# Altium PCB End OptoSwitch type2M.PcbDoc
Units mm, origin at the board's own origin, x right, y up, seen from the top; angles counter-clockwise.
Board outline 152.4 x 101.6 mm, 2 copper layers (Top Layer, Bottom Layer); 4 components, 5 nets, 16 pads, 5 vias.
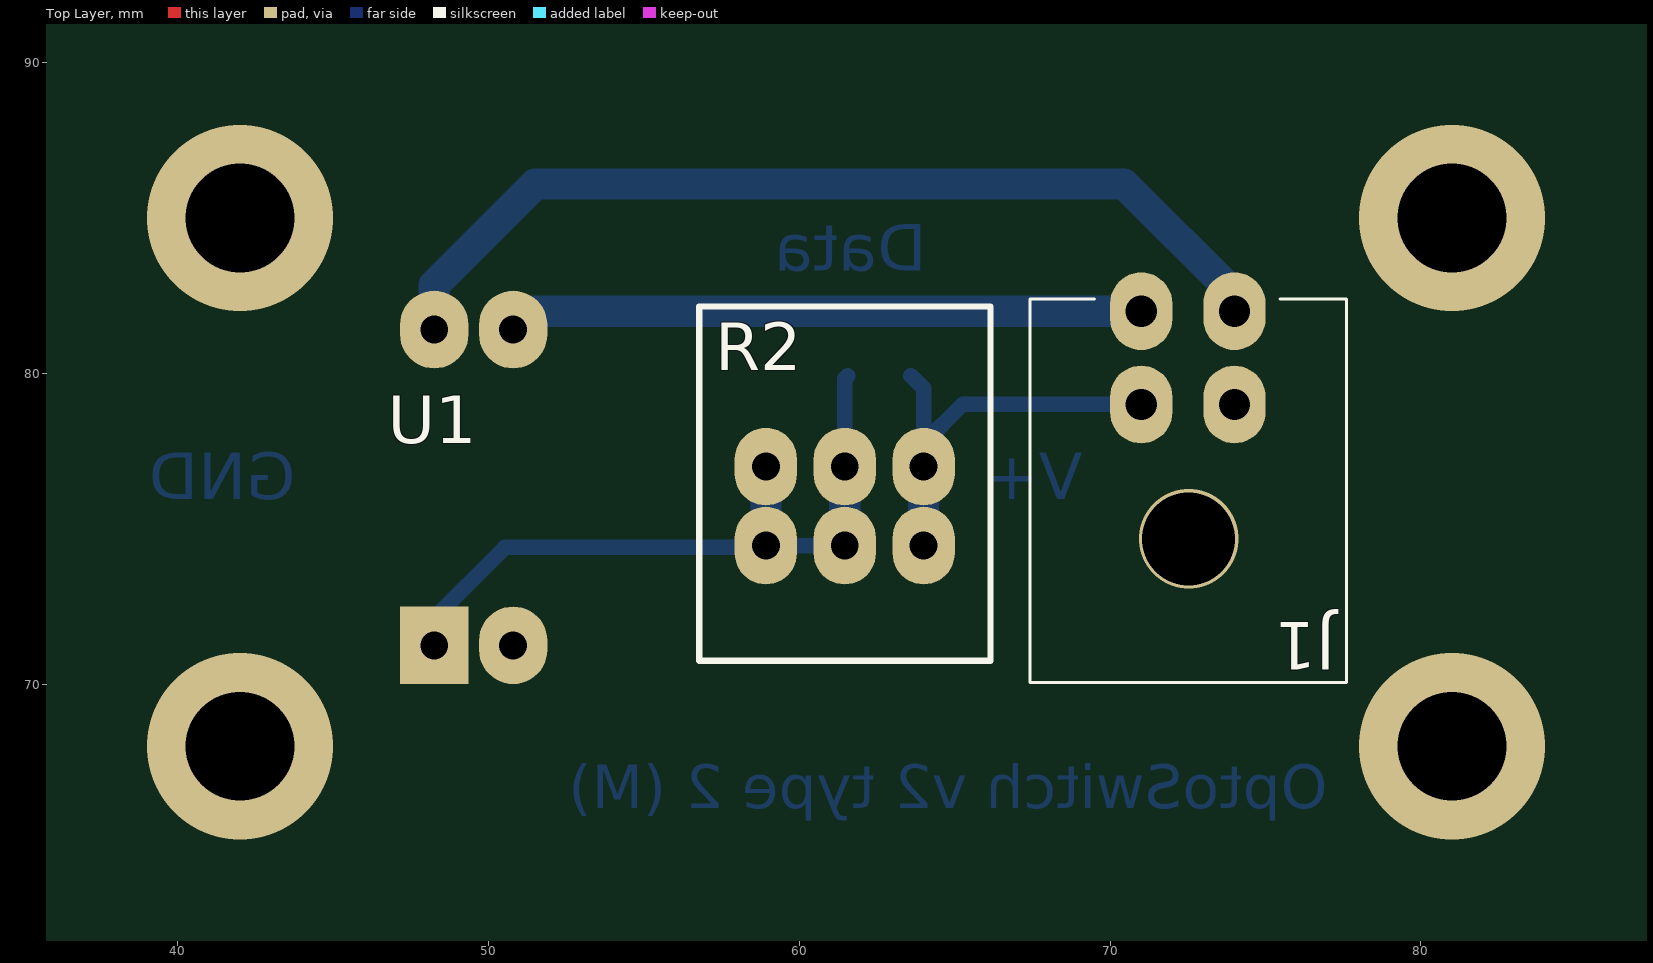
[diagram p0: Top Layer view]
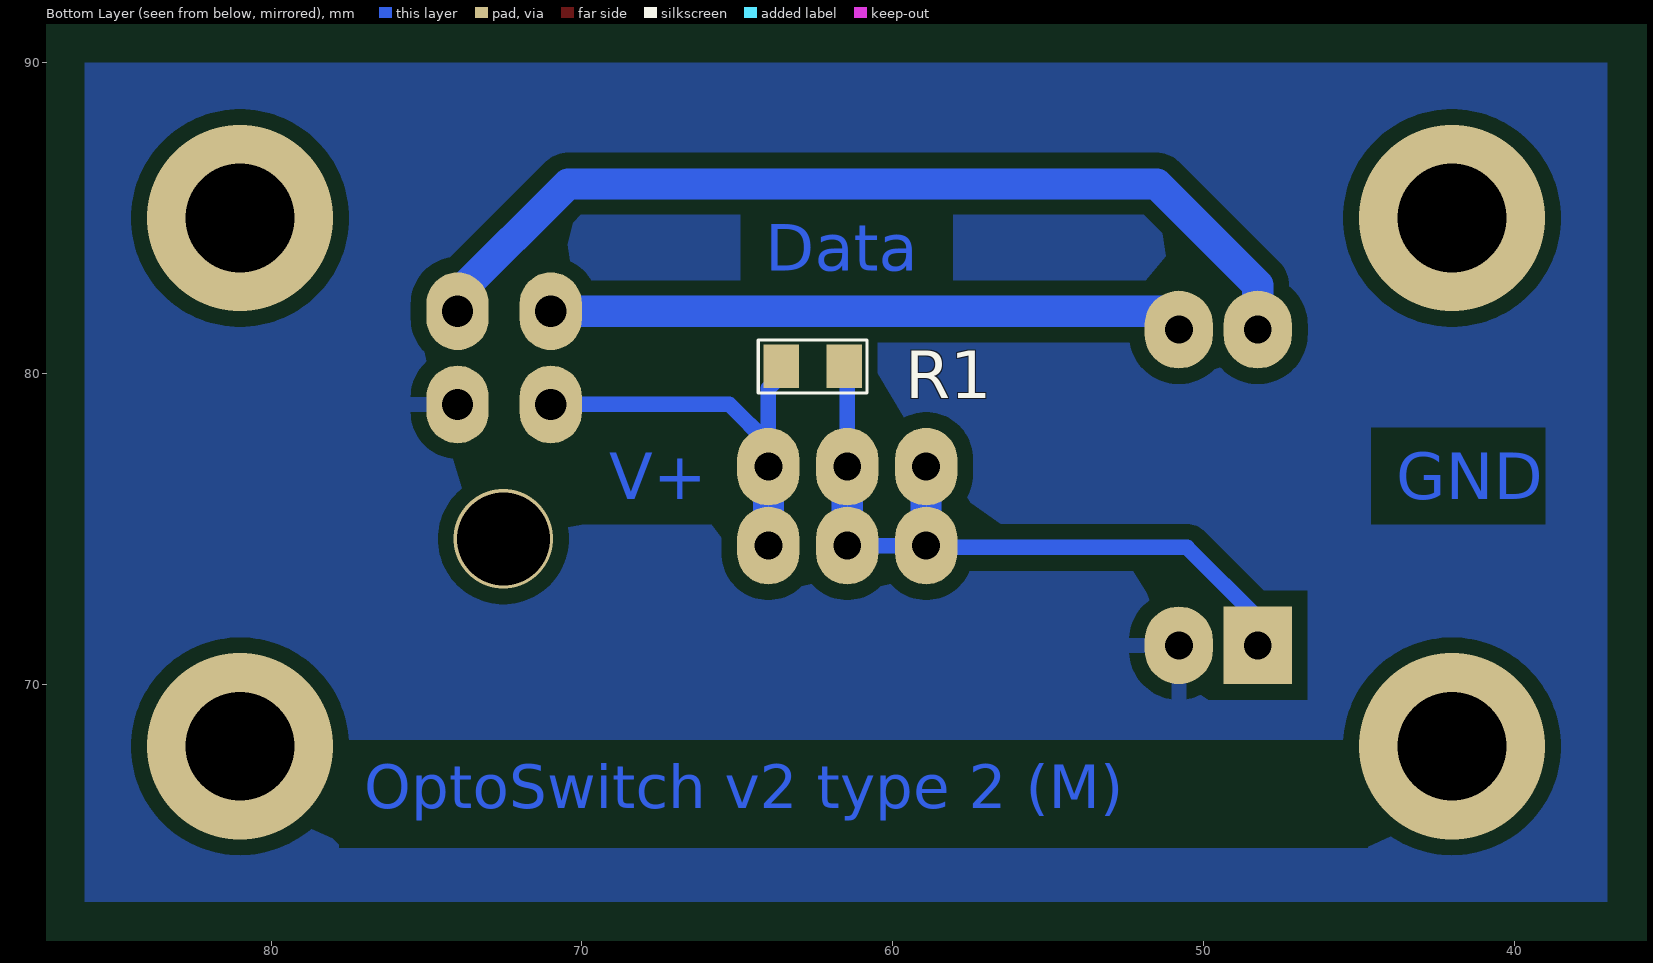
[diagram p1: Bottom Layer view, seen from below]
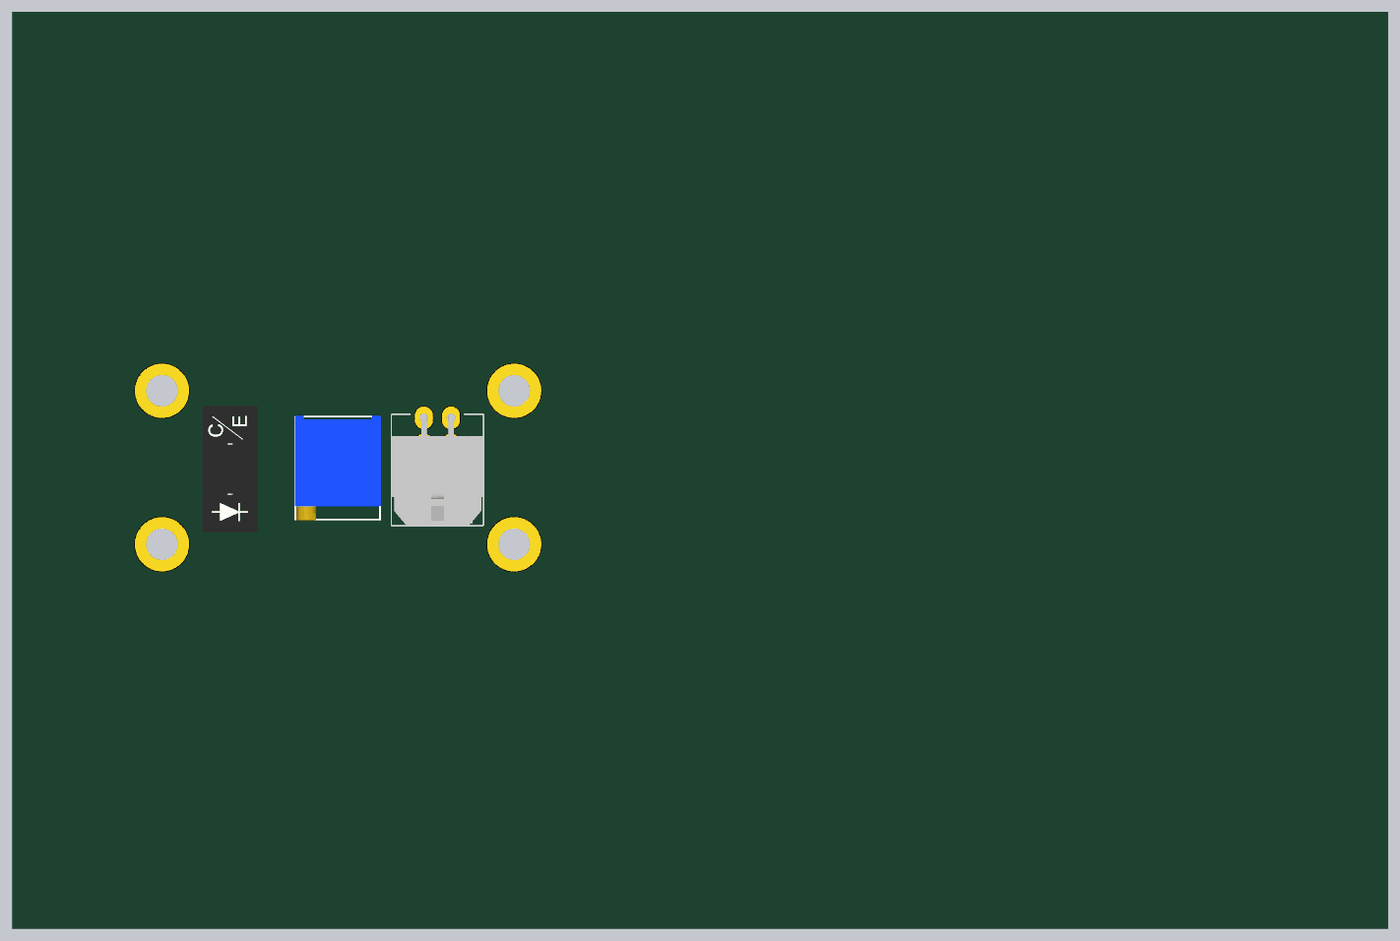
[diagram p2: 3D render of the assembled board from above, using the file's embedded part models]

## Layer stack, top to bottom
Top Solder: solder mask 0.0102, Solder Resist, Dk 3.5
Top Layer: signal copper 0.0356
Dielectric 1: dielectric 0.32, FR-4, Dk 4.8
Bottom Layer: signal copper 0.0356
Bottom Solder: solder mask 0.0102, Solder Resist, Dk 3.5

## Board outline
25.4,25.4 177.8,25.4 177.8,127 25.4,127

## Design rules (kind name [scope] priority, off if disabled: settings)
Clearance [All] p1: gap=0.3
HoleSize [All] p1: absolutevalues=TRUE maxlimit=5 minlimit=0.025 maxpercent=80.000 minpercent=20.000
PlaneConnect [All] p1: planeconnectstyle=Relief reliefexpansion=0.5 reliefentries=4 reliefconductorwidth=0.5 reliefairgap=0.5
PolygonConnect [All] p1: connectstyle=Relief reliefconductorwidth=0.5 reliefentries=4 polygonreliefangle="90 Angle" airgapwidth=0.5
RoutingVias [All] p1: holewidth=0.711 width=1.27 viastyle="Through Hole" minholewidth=0.711 minwidth=1.27 maxholewidth=0.711 maxwidth=1.27
SolderMaskExpansion [All] p1: expansion=0.102
Width [All] p1: maxlimit=3 minlimit=0.5 preferedwidth=1
27 further rules are at their usual default settings.

## Components (designator, comment, footprint, x,y, rotation, side; value= is the part's Value field where it differs from the comment)
J1 "Connector" "Molex Micro-Fit 3.0 - 4 pin D R" 74,79 r0 top
R1 "? Om" "SMD 0805 (2012)" 63.6,80.2 r180 bottom
R2 "1 КOm" "Res Adj 3296 Univ" 64,77 r270 top
U1 "OptoSwitch" OptoSwitch 48.25,71.25 r90 top

## Footprints (in the part's own frame and the unit in brackets; to place one, negate y for a bottom-side part, rotate by r counter-clockwise, add the part's x,y. Pads: shape width x height; smd on the part's side, far side on the other; paste and mask are expansions set on the pad)
"Molex Micro-Fit 3.0 - 4 pin D R" [mm]
  oval 2x2.5 hole 1: 1(0,0) 2(-3,0) 3(0,3) 4(-3,3)
  silkscreen extent -6.58,-8.95 3.6,3.4, body extent -6.55,-8.94 3.6,3.3, height 8.83
OptoSwitch [mm]
  rect 2.5x2.2 hole 0.9: A(0,0)
  oval 2.5x2.2 hole 0.9: C(10.16,0) E(10.16,-2.54) K(0,-2.54)
  body extent -1.92,-4.35 12.08,1.77, height 10
"Res Adj 3296 Univ" [mm]
  oval 2.5x2 hole 0.9: 1(0,0) 1(2.54,0) 2(0,-2.54) 2(2.54,-2.54) 3(0,-5.08) 3(2.54,-5.08)
  Bottom Layer lines w1: 2.54,-5.08 0,-5.08 ; 2.54,-2.54 0,-2.54 ; 2.54,0 0,0
  silkscreen extent -5.15,-7.22 6.25,2.15, body extent -5.22,-7.3 6.32,2.23, height 4.82
"SMD 0805 (2012)" [mil]
  rect 45x55 smd: 1(0.35,0.98) 2(80.35,0.98)
  silkscreen extent -29,-32 109,34, body extent 1,-24 80,26, height 18

## Part data
J1: library part "Micro-Fit 4R (2x2)", "Horisontal, Dbl line, Male - 3mm"
R1: library part "Res SMD 0805"
R2: library part "Res Adj 3296"
U1: library part "Optocouplier (Switch)"

## Via types
v1: diameter 6, hole 3.5, Top Layer to Bottom Layer, 4 vias
v2: diameter 3.2, hole 3, Top Layer to Bottom Layer, 1 vias

## Nets (pads, with @x,y where several pads share a name; then routed paths per layer and width w, separated by ;. In a path a pad name is that pad's centre, name@x,y a point inside that pad or via, vN(x,y) a via of type N, cw(c..) or ccw(c..) an arc to the next point about the centre after c; other vN are vias at no path point)
GND: J1.1 U1.K
NetJ1_2: J1.2 R1.1 R2.1 | length 11.4
  Bottom Layer w0.5: R1.1@63.591,79.925 64,79.516 64,77 64,77.75 65.25,79 J1.2 ; R2.1@63.991,74.451 R2.1@64,74.46
NetJ1_3: J1.3 U1.C | length 30.6
  Bottom Layer w1: U1.C 48.25,82.85 51.5,86.1 70.45,86.1 74,82.55 J1.3
NetJ1_4: J1.4 U1.E | length 20
  Bottom Layer w1: U1.E@51,82 J1.4
NetR1_2: R1.2 R2.2 R2.3 U1.A | length 18.5
  Bottom Layer w0.5: U1.A@48.186,71.186 48.186,72.064 50.522,74.4 R2.3@58.584,74.4 ; R2.3@58.92,74.46 61.46,74.46 R2.2@61.959,73.961 ; R2.2@61.46,77 61.46,79.826 R1.2@61.559,79.925
copper on no net:
  other v1: 42,68 81,68 42,85 81,85
  other v2: 72.525,74.675

## Polygon pours and split planes (outlines as drawn)
GND on Bottom Layer "Top Layer-No Net" (solid, pour order 3): 37,90 86,90 86,63 37,63

## Other copper
Bottom Layer:
  text "Data" at 64.1,83.3 h1.5
  text "GND" at 43.8,75.95 h1.5
  text "V+" at 69.125,75.95 h1.5
  text "OptoSwitch v2 type 2 (M)" at 77,66 h1.4